# Altium PCB PCB.PcbDoc
Units mil, origin at the board's own origin, x right, y up, seen from the top; angles counter-clockwise.
Board outline 5000 x 4000 mil, 4 copper layers (Top Layer, Internal Plane 1, Internal Plane 2, Bottom Layer); 19 components, 26 nets, 81 pads, 0 vias.
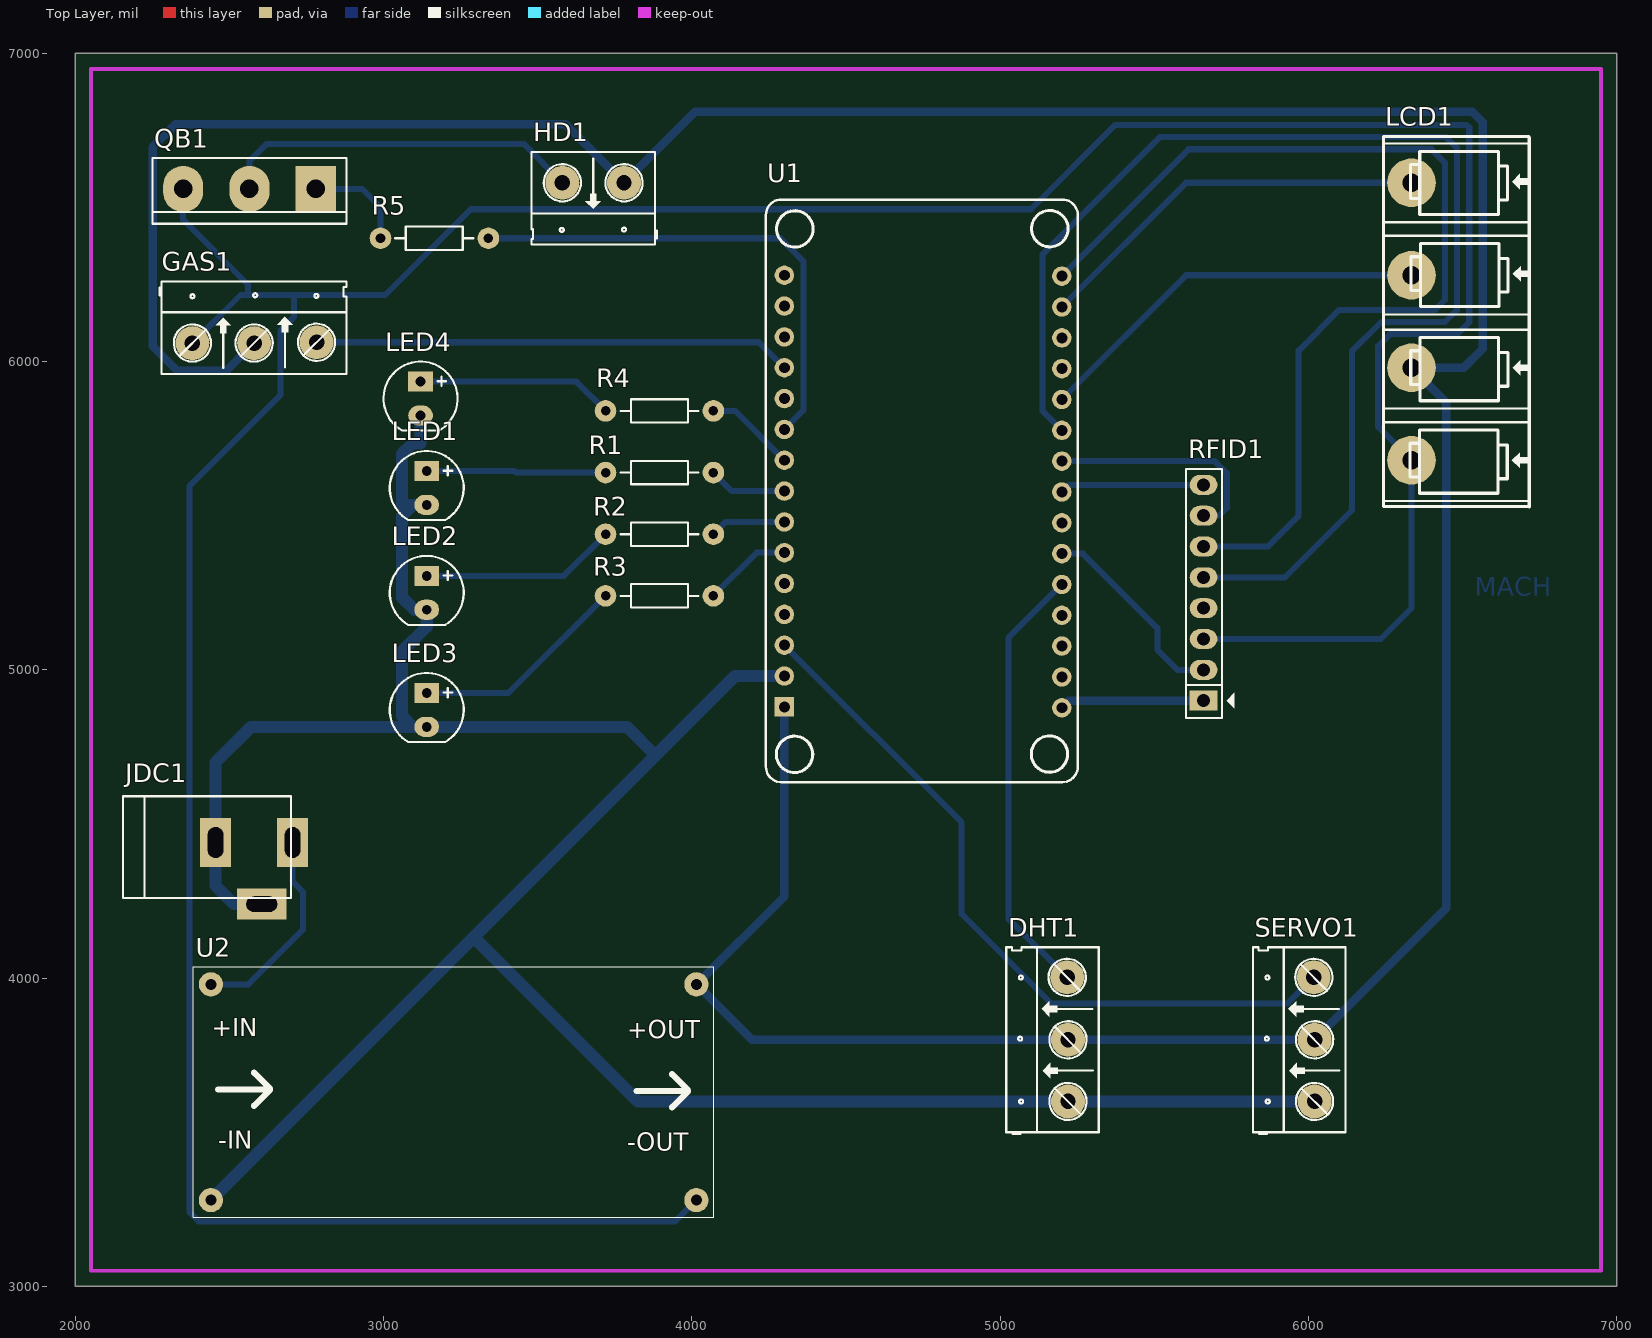
[diagram p0: Top Layer view]
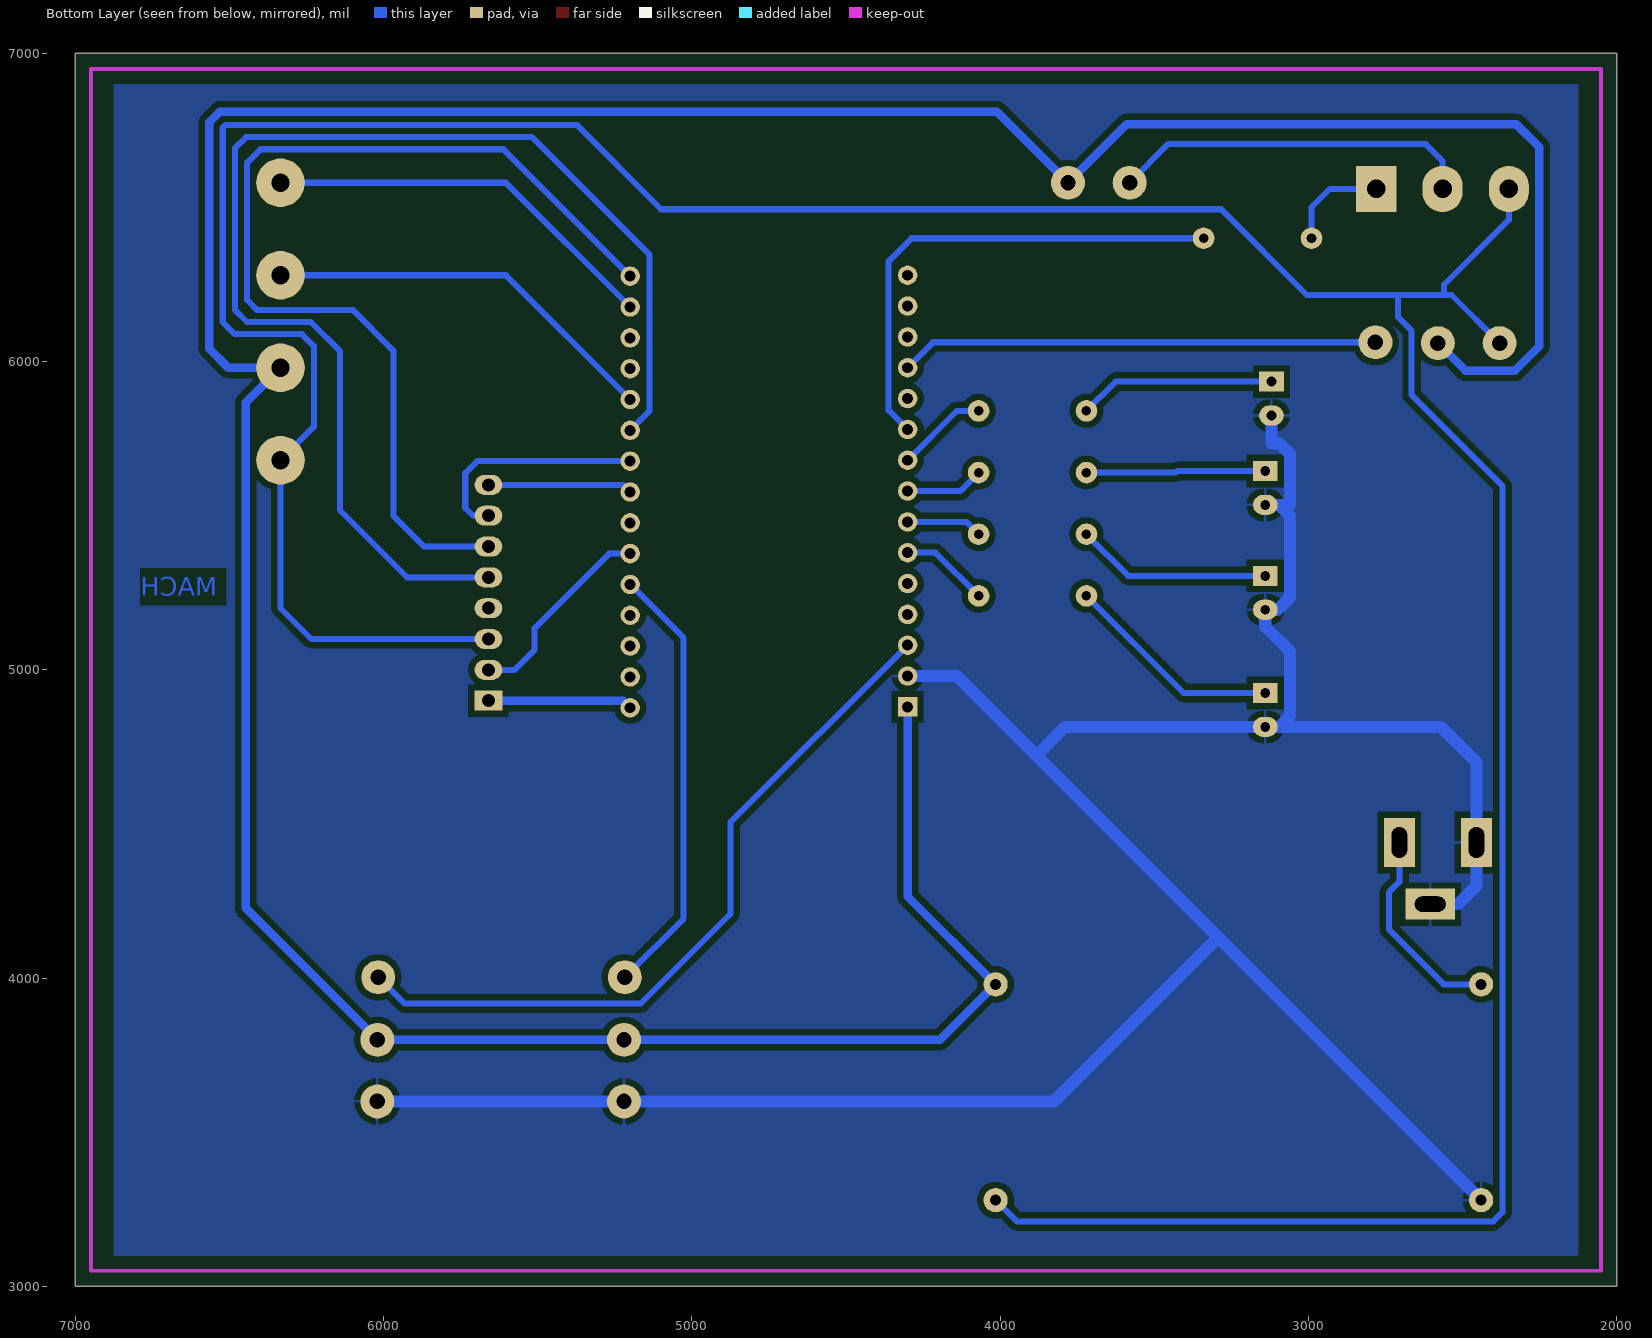
[diagram p1: Bottom Layer view, seen from below]
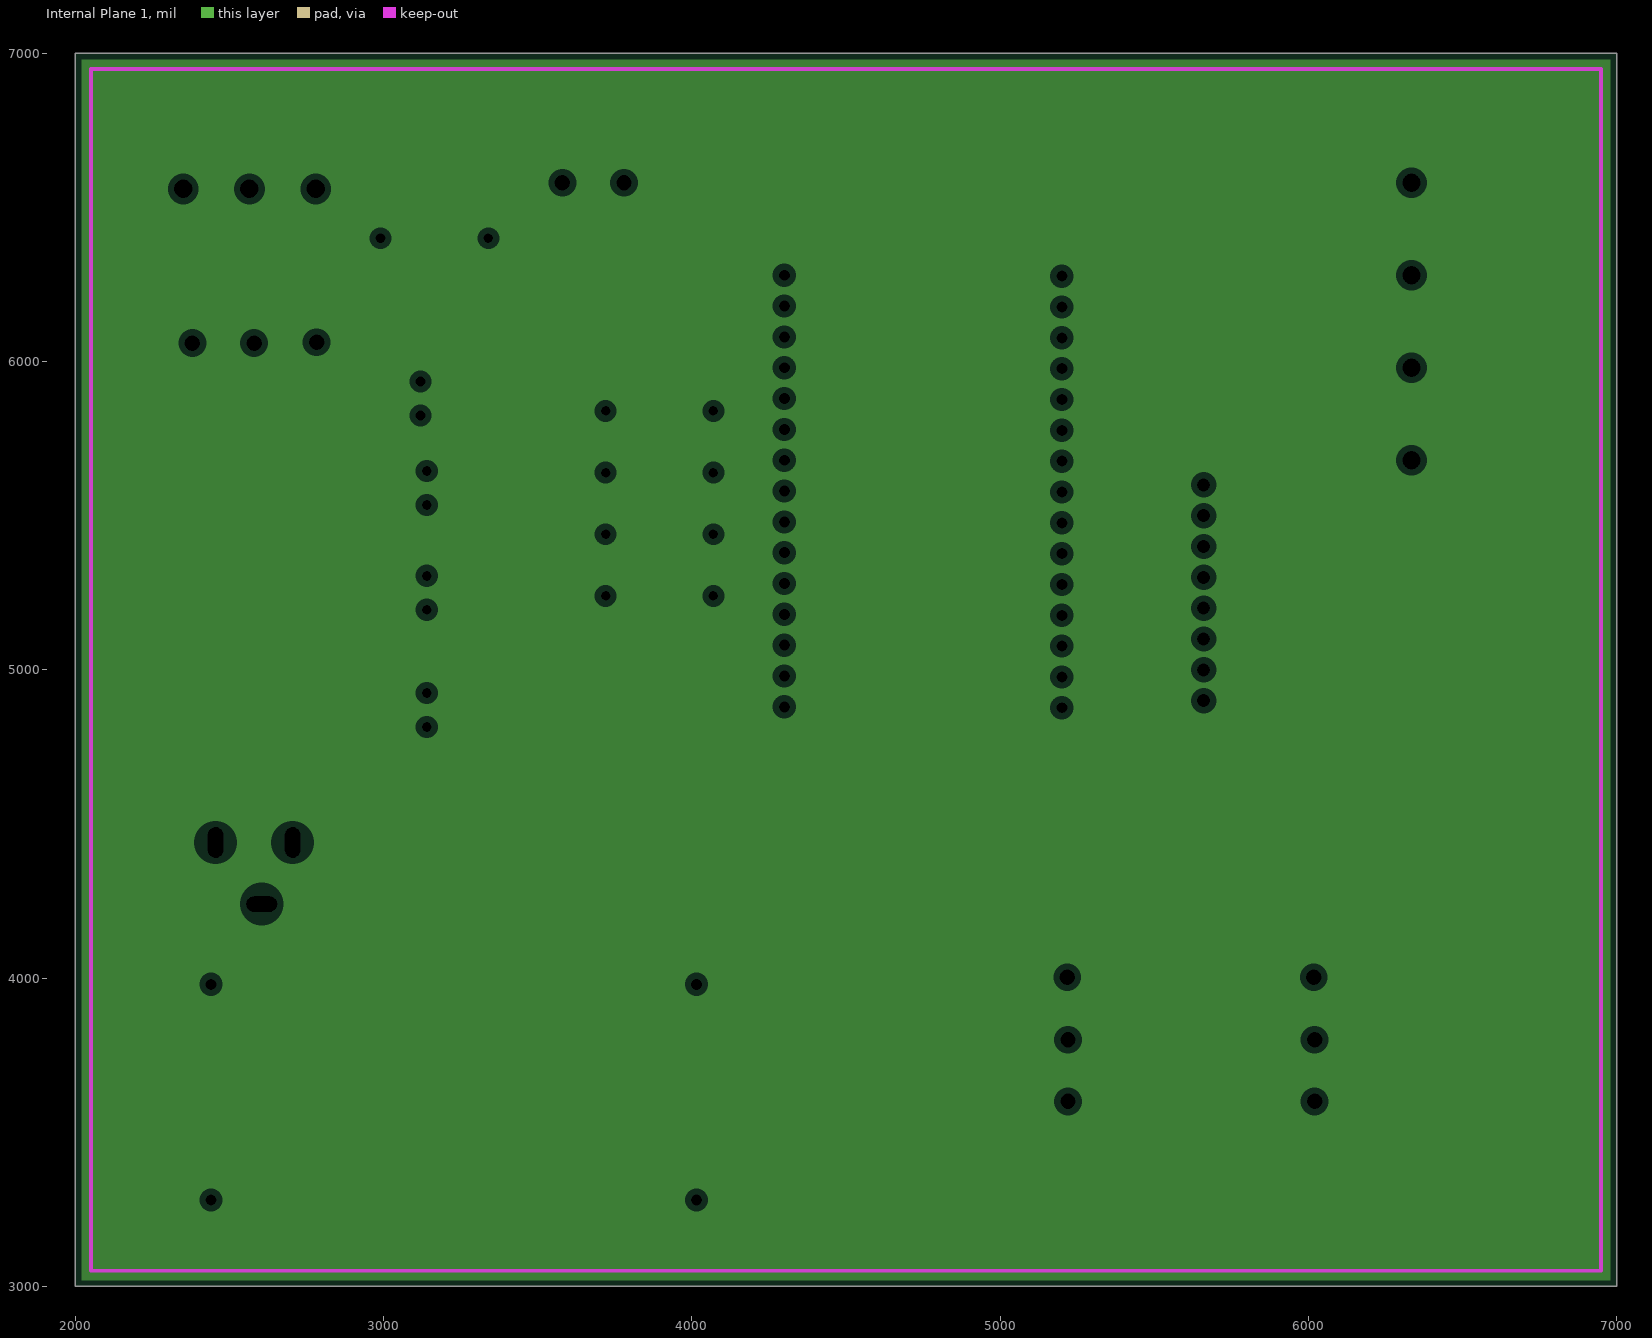
[diagram p2: Internal Plane 1, clearances drawn from the general rule]
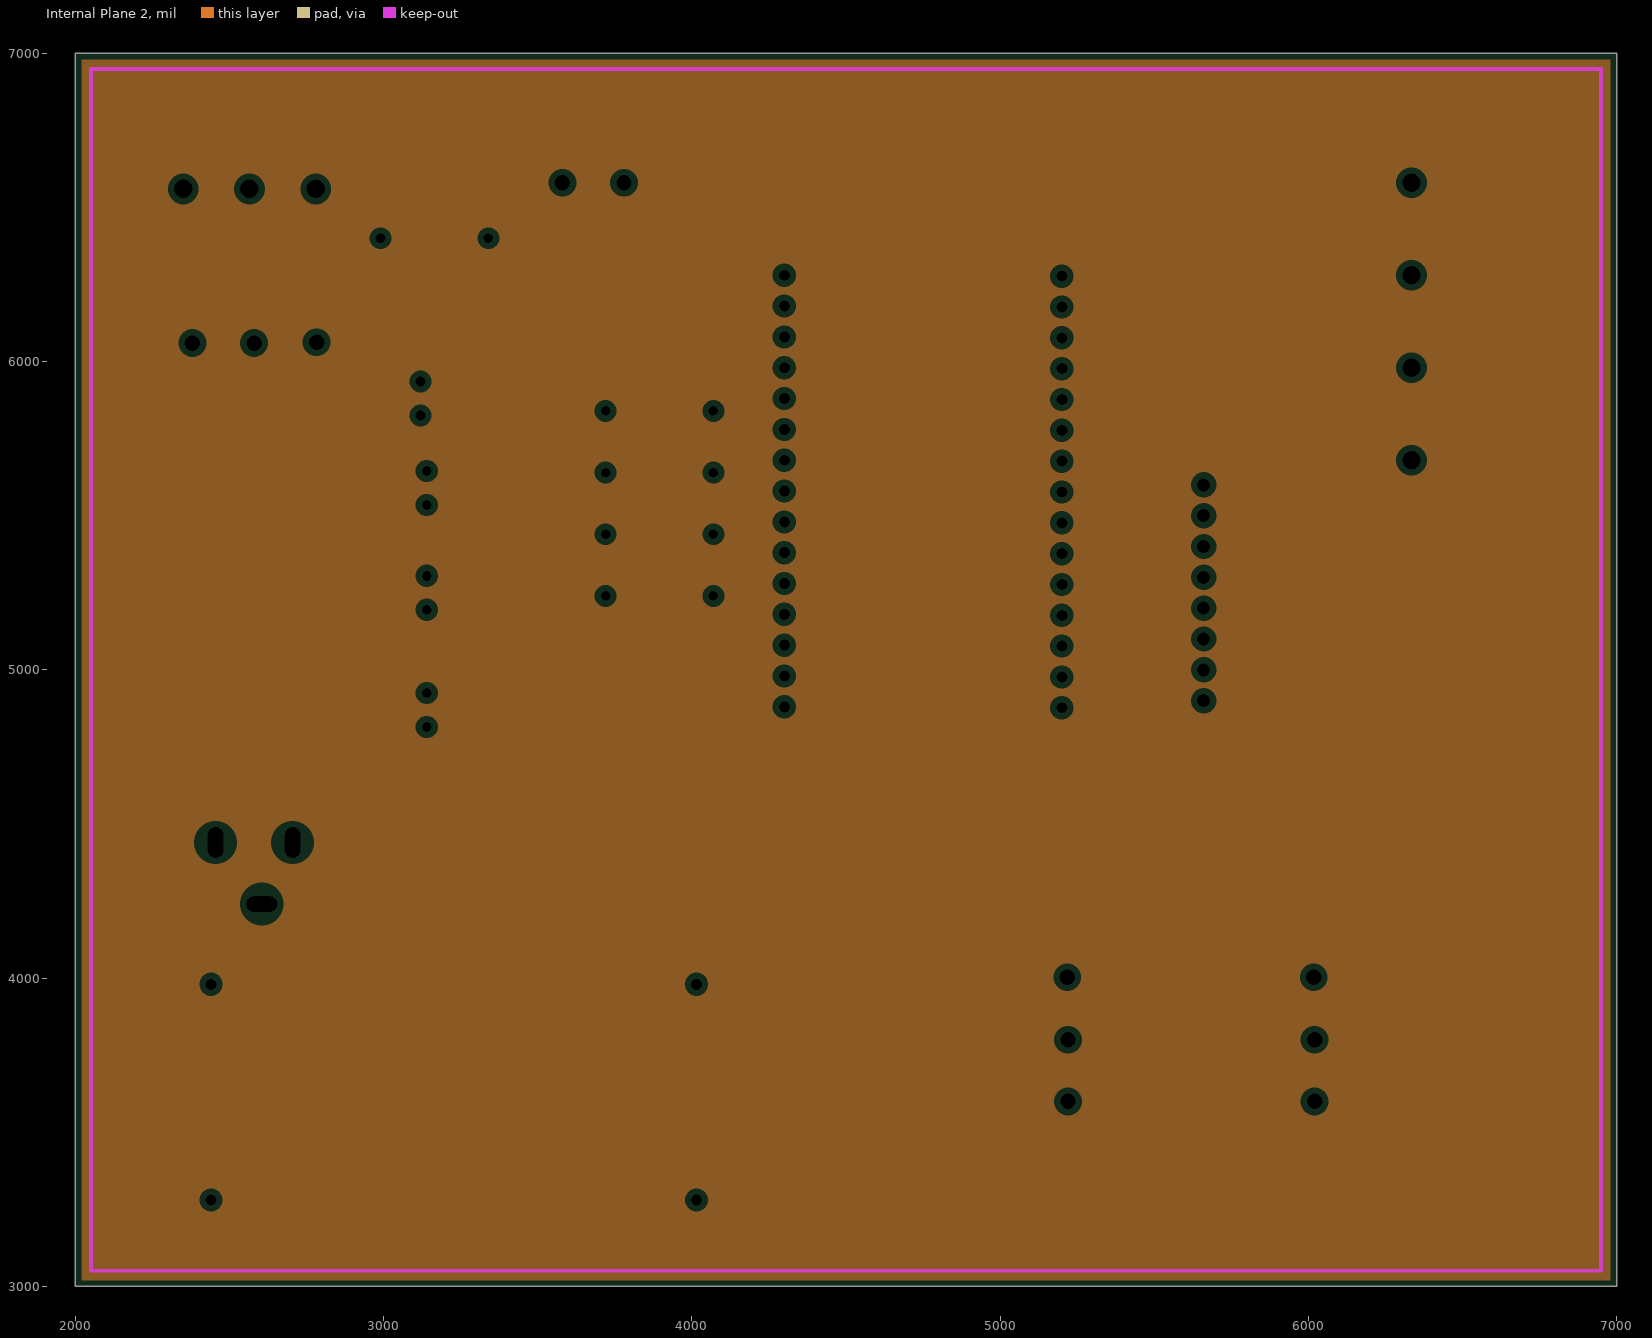
[diagram p3: Internal Plane 2, clearances drawn from the general rule]
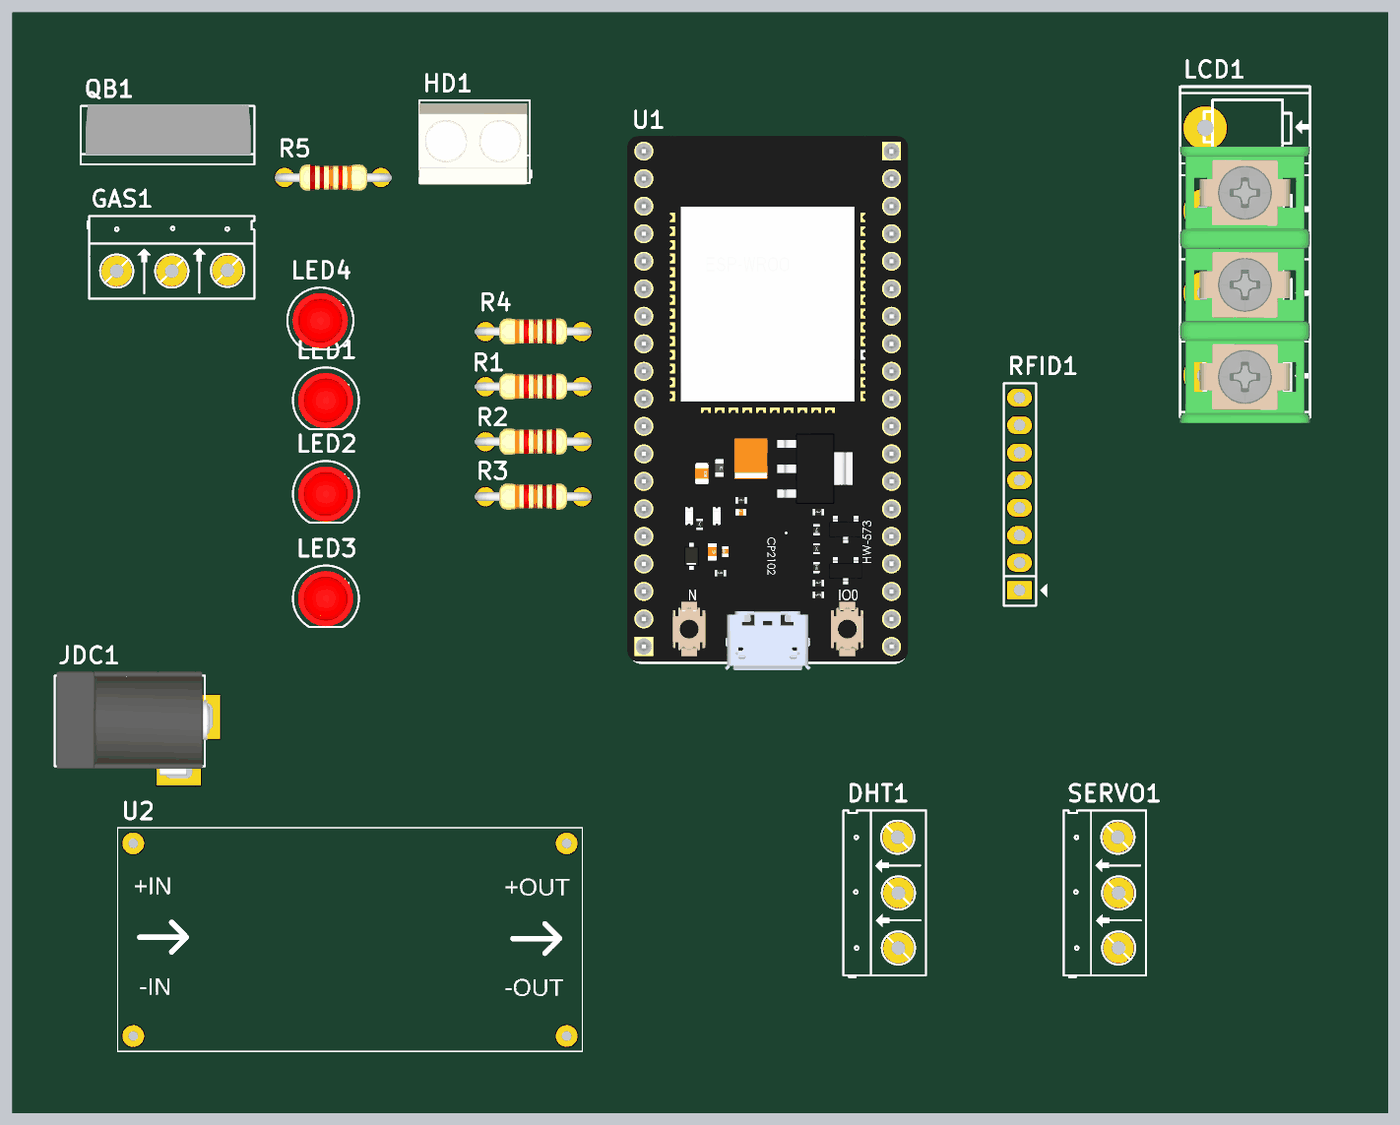
[diagram p4: 3D render of the assembled board from above, using the file's embedded part models]

## Layer stack, top to bottom
Top Layer: signal copper 1.4
Dielectric: dielectric 12.6, FR-4, Dk 4.8
Internal Plane 1: plane copper 1.4
Dielectric: dielectric 12.6, FR-4, Dk 4.8
Internal Plane 2: plane copper 1.4
Dielectric: dielectric 12.6, FR-4, Dk 4.8
Bottom Layer: signal copper 1.4

## Board outline
2000,3000 7000,3000 7000,7000 2000,7000

## Design rules (kind name [scope] priority, off if disabled: settings)
Clearance [All] p1: gap=19.68
PlaneClearance [All] p1: clearance=20
PlaneConnect [All] p1: planeconnectstyle=Relief reliefexpansion=20 reliefentries=4 reliefconductorwidth=10 reliefairgap=10
PolygonConnect [All] p1: connectstyle=Relief reliefconductorwidth=10 reliefentries=4 polygonreliefangle="90 Angle"
RoomDefinition mach [InComponentClass('mach')] p1: confinementstyle=ConfineIn formatcopy=TRUE lockcomponents=FALSE outline 0,0 2000,0 2000,1000 0,1000
RoutingLayers [All] p1: top layer_v5=FALSE bottom layer_v5=TRUE
RoutingVias [All] p1: holewidth=25 width=40 viastyle="Through Hole" minholewidth=28 minwidth=50 maxholewidth=28 maxwidth=50
SilkscreenOverComponentPads [All] p1: minsilkscreentomaskgap=10
SolderMaskExpansion [All] p1: expansion=4
Width VCC [InNet('VCC')] p1: maxlimit=27.56 minlimit=27.56 preferedwidth=27.56
Width GND [InNet('GND')] p2: maxlimit=39.37 minlimit=39.37 preferedwidth=39.37
Width 3.3 [InNet('3.3V')] p3: maxlimit=27.56 minlimit=27.56 preferedwidth=27.56
Width NET [All] p4: maxlimit=19.68 minlimit=19.68 preferedwidth=19.68
24 further rules are at their usual default settings.

## Components (designator, comment, footprint, x,y, rotation, side; value= is the part's Value field where it differs from the comment)
DHT1 "Header 3" HED3 5220,3600 r90 top
GAS1 "Header 3" HED3 2380,6060 r0 top
HD1 "Header 2" HED2 3780,6580 r180 top
JDC1 "Jac DC" DC-IN 2580,4340 r0 top
LCD1 "Header 4" KF8500-4P 6480,5680 r90 top
LED1 "" LED-5 3140,5590 r270 top
LED2 "" LED-5 3140,5250 r270 top
LED3 "" LED-5 3140,4870 r270 top
LED4 "" LED-5 3120,5880 r270 top
QB1 "D718" QTO-247 2780,6560 r180 top
R1 "220" R1/4W 3720,5640 r0 top
R2 "220" R1/4W 3720,5440 r0 top
R3 "220" R1/4W 3720,5240 r0 top
R4 "220" R1/4W 3720,5840 r0 top
R5 "1k" R1/4W 3340,6400 r180 top
RFID1 "JP8 PIN" JP8 5660,4900 r90 top
SERVO1 "Header 3" HED3 6020,3600 r90 top
U1 "ESP32-BOARD30" ESP32-BOARD30-900 4300,4880 r0 top
U2 "LM2596_DC-DC" LM2596-DCDC 2440,3980 r0 top

## Footprints (in the part's own frame and the unit in brackets; to place one, negate y for a bottom-side part, rotate by r counter-clockwise, add the part's x,y. Pads: shape width x height; smd on the part's side, far side on the other; paste and mask are expansions set on the pad)
DC-IN [mil] "Jac DC input"
  rect 100x160 hole 50 slot 100 at 90 deg: 1(125,100) 2(-125,100)
  rect 160x100 hole 50 slot 100 at 0 deg: 3(25,-100)
  silkscreen extent -425,-80 120,250, body extent -418,-113 137,265, height 433
ESP32-BOARD30-900 [mm] "Footprint for ESP-32S-BOARD30-PIN, W=900mil"
  rect 1.6x1.6 hole 0.9: 1(0,0)
  round 1.6 hole 0.9: 2(0,2.54) 3(0,5.08) 4(0,7.62) 5(0,10.16) 6(0,12.7) 7(0,15.24) 8(0,17.78) 9(0,20.32) 10(0,22.86) 11(0,25.4) 12(0,27.94) 13(0,30.48) 14(0,33.02) 15(0,35.56) 16(22.86,35.484) 17(22.86,32.944) 18(22.86,30.404) 19(22.86,27.864) 20(22.86,25.324) 21(22.86,22.784) 22(22.86,20.244) 23(22.86,17.704) 24(22.86,15.164) 25(22.86,12.624) 26(22.86,10.084) 27(22.86,7.544) 28(22.86,5.004) 29(22.86,2.464) 30(22.86,-0.076)
  silkscreen extent -1.52,-6.2 24.17,41.8, body extent -1.65,-6.88 24.26,42.44, height 4.6
HED2 [mil] "Header 2, 2 pin, hight 300mil, Pin to Pin 200, Colour Green"
  round 110 hole 50: 1(0,0) 2(200,0)
  silkscreen extent -106,-100 300,200, body extent -92,-90 302,205, height 394
HED3 [mil] "Header 3, 3 pin, hight 300mil, Pin to Pin 200, Colour Green"
  round 110 hole 50: 1(0,0) 2(200,0) 3(402.62,2.62)
  silkscreen extent -106,-100 500,200
JP8 [mil] "JP8"
  rect 65x90 hole 42: 1(0,0)
  oval 65x90 hole 42: 2(100,0) 3(200,0) 4(300,0) 5(400,0) 6(500,0) 7(600,0) 8(700,0)
  silkscreen extent -56,-100 752,57
KF8500-4P [mm] "Header 4 - 20A"
  round 4 hole 1.5: 1(0,3.7) 2(7.62,3.7) 3(15.24,3.7) 4(22.86,3.7)
  silkscreen extent -3.84,-6 26.67,6, body extent -4.37,-5.97 21.13,6.03, height 12.4
LED-5 [mil] "LED 2 PIN, 5 ly , Only colour, pin to pin 110mil"
  rect 65x80 hole 32: 1(-55,0)
  oval 65x80 hole 32: 2(55,0)
  silkscreen extent -120,-120 104,120, body extent -100,-101 101,100, height 339
LM2596-DCDC [mm] "Module LM2596 DC DC"
  round 2 hole 0.9: 1(0,0) 2(0,-17.78) 3(40,-17.78) 4(40,0)
  silkscreen extent -1.45,-19.2 41.43,1.45
QTO-247 [mil] "TO-247"
  rect 130x150 hole 60: 1(0,0)
  oval 130x150 hole 60: 2(215,0) 3(430,0)
  silkscreen extent -100,-100 530,113, body extent -87,-103 513,77, height 1110
R1/4W [mil] "R 1/4W, 2 Pin, 350mil"
  round 70 hole 31: 1(0,0) 2(350,0)
  silkscreen extent 48,-38 302,38, body extent -40,-47 386,47, height 111

## Part data
DHT1 GAS1 SERVO1: library part Hed3, "Header 3 (Green)"
HD1: library part Hed2, "Header 2 (Green)"
JDC1: library part DCIN, "Jac DC input"
LCD1: library part Hed4, "Header 4 (Green)"
LED1 LED2 LED3 LED4: library part LED, "LED Single colour Green and Red"
QB1: "Transistor Power Supply"
R1 R2 R3 R4 R5: library part R, "Resistor 1/4W"
RFID1: library part JP8
U2: library part "LM2596S DC-DC", "Module LM2596_DC-DC"

## Nets (pads, with @x,y where several pads share a name; then routed paths per layer and width w, separated by ;. In a path a pad name is that pad's centre, name@x,y a point inside that pad or via, vN(x,y) a via of type N, cw(c..) or ccw(c..) an arc to the next point about the centre after c; other vN are vias at no path point)
3.3V: RFID1.1 U1.30 | length 469.5
  Bottom Layer w27.56: U1.30 5223,4900 RFID1.1
DHT: DHT1.3 U1.26 | length 1424.9
  Bottom Layer w19.68: U1.26 5027,5104 5027,4193 DHT1.3
GAS: GAS1.3 U1.12 | length 1551.6
  Bottom Layer w19.68: GAS1.3 4217.38,6062.62 U1.12
GND: DHT1.1 JDC1.2 JDC1.3 LED1.2 LED2.2 LED3.2 LED4.2 SERVO1.1 U1.2 U2.2 | length 8951.7
  Bottom Layer w39.37: U2.2 4140,4980 U1.2 ; JDC1.3 2515,4240 2455,4300 JDC1.2 2455,4700 2570,4815 3095,4815 ; LED4.2 3120,5735 3095,5735 3060,5700 3060,5535 3095,5535 ; 3295,4130 3825,3600 DHT1.1 SERVO1.1 ; 3365,4815 3345,4815 ; 3880,4725 3790,4815 3345,4815 ; 3095,4815 LED3.2 ; 3095,4815 3060,4850 3060,5060 3140,5140 LED2.2 3100,5195 3060,5235 3060,5500 3095,5535 ; 3095,4815 LED3.2 ; 3095,5535 LED1.2 3095,5535 ; LED3.2 3345,4815
GND\: GAS1.1 LCD1.1 QB1.3 RFID1.3 U2.3 | length 12229.7
  Bottom Layer w19.68: QB1.3 2350,6460 2560,6250 2560,6220 ; GAS1.1 2536,6216 3005,6216 3283,6494 5100,6494 5373.74,6767.74 5730.24,6767.74 5730.61,6767.37 6513.11,6767.37 6521.74,6758.74 6521.74,6128.19 6482.55,6089 6265,6089 6226,6050 6226,5788.33 LCD1.1 6334.33,5200 6234.33,5100 RFID1.3 ; 2710,6210 2710,6145 2665,6100 2665,5891 2371,5597 2371,3240 2400,3211 3945.8,3211 U2.3
LED1: R1.2 U1.8 | length 254.9
  Bottom Layer w19.68: R1.2 4130,5580 U1.8
LED2: R2.2 U1.7 | length 246.6
  Bottom Layer w19.68: R2.2 4110,5480 U1.7
LED3: R3.2 U1.6 | length 288
  Bottom Layer w19.68: R3.2 4210,5380 U1.6
LED4: R4.2 U1.9 | length 296.3
  Bottom Layer w19.68: R4.2 4140,5840 U1.9
MISO: RFID1.5 U1.21 | length 4121.4
  Bottom Layer w19.68: U1.21 5138,5839 5138,6348 5518,6728 6446.07,6728 6482.17,6691.91 6482.17,6167.54 6443,6128.37 6236.37,6128.37 6141,6033 6141,5517 5924,5300 RFID1.5
MOSI: RFID1.6 U1.16 | length 3304.5
  Bottom Layer w19.68: U1.16 5611.63,6688.63 6399.11,6688.63 6442.8,6644.94 6442.8,6199.8 6410.74,6167.74 6100,6167.74 5968,6035.74 5968,5500 5868,5400 RFID1.6
NetHD1_2: HD1.2 QB1.2 | length 1180.4
  Bottom Layer w19.68: QB1.2 2565,6650 2621,6706 3454,6706 HD1.2
NetJDC1_1: JDC1.1 U2.1 | length 668.8
  Bottom Layer w19.68: U2.1 2561,3980 2739,4158 2739,4278 2705,4312 JDC1.1
NetLED1_1: LED1.1 R1.1 | length 582.1
  Bottom Layer w19.68: LED1.1 3425,5645 3430,5640 R1.1
NetLED2_1: LED2.1 R2.1 | length 635.9
  Bottom Layer w19.68: LED2.1 3585,5305 R2.1
NetLED3_1: LED3.1 R3.1 | length 710.5
  Bottom Layer w19.68: LED3.1 3405,4925 R3.1
NetLED4_1: LED4.1 R4.1 | length 639.4
  Bottom Layer w19.68: LED4.1 3625,5935 R4.1
NetQB1_1: QB1.1 R5.2 | length 334.9
  Bottom Layer w19.68: QB1.1 2930,6560 2990,6500 R5.2
QUAT: R5.1 U1.10 | length 1623.7
  Bottom Layer w19.68: R5.1 4287,6400 4362,6325 4362,5842 U1.10
RST: RFID1.2 U1.25 | length 655.2
  Bottom Layer w19.68: U1.25 5268,5377 5510,5135 5510,5065 5575,5000 ; 5577,5000 RFID1.2
SCK: RFID1.7 U1.22 | length 749.5
  Bottom Layer w19.68: U1.22 5696,5677 5735,5638 5735,5525 5710,5500 RFID1.7
SCL: LCD1.4 U1.17 | length 1301.3
  Bottom Layer w19.68: U1.17 5603,6580 LCD1.4
SDA: LCD1.3 U1.20 | length 1301.3
  Bottom Layer w19.68: U1.20 5603,6280 LCD1.3
SIGNAL: SERVO1.3 U1.3 | length 2407.7
  Bottom Layer w19.68: U1.3 4875,4505 4875,4208 5165,3918 5932.76,3918 SERVO1.3
SS: RFID1.8 U1.23 | length 469.5
  Bottom Layer w19.68: U1.23 5223,5600 RFID1.8
VCC: DHT1.2 GAS1.2 HD1.1 LCD1.2 SERVO1.2 U1.1 U2.4 | length 12070.4
  Bottom Layer w27.56: GAS1.2 2491,5971 2330,5971 2251,6050 2251,6695 2326,6770 3590,6770 HD1.1 4011.05,6811.05 6530.75,6811.05 6565.05,6776.75 6565.05,6041.05 6504,5980 LCD1.2 6447,5867.33 6447,4227 SERVO1.2 DHT1.2 4194.8,3800 U2.4 4300,4265.2 U1.1
pads on no net: RFID1.4 U1.4 U1.5 U1.11 U1.13 U1.14 U1.15 U1.18 U1.19 U1.24 U1.27 U1.28 U1.29

## Polygon pours and split planes (outlines as drawn)
GND on Bottom Layer "Top Layer-No Net" (solid, remove dead copper): 2125,6900 6875,6900 6875,3100 2130,3100 2125,3095 2125,6900
no net on Internal Plane 1 (split plane): 6979.9,3020.1 2020.1,3020.1 2020.1,6979.9 6979.9,6979.9
no net on Internal Plane 2 (split plane): 6979.9,3020.1 2020.1,3020.1 2020.1,6979.9 6979.9,6979.9

## Keep-outs
Keep-Out Layer:
  lines w11.81: 2051.18,3051.18 2051.18,6948.82 6948.82,6948.82 6948.82,3051.18 2051.18,3051.18

## Other copper
Bottom Layer:
  text "MACH" at 6540,5240 h60

## Dimensions
2051.18,3051.18 to 2051.18,6948.82 on Mechanical 1
2051.18,3051.18 to 6948.82,3051.18 on Mechanical 1

## Text inside footprints (layer, text, board x,y; h text height)
U2: Top Overlay "-OUT" at 3791,3421 h100; Top Overlay "+OUT" at 3791,3786 h100; Top Overlay "+IN" at 2443,3792 h100; Top Overlay "-IN" at 2463.35,3427 h100